# EAGLE board ETD555_PROJECT (EAGLE 9.7.0)
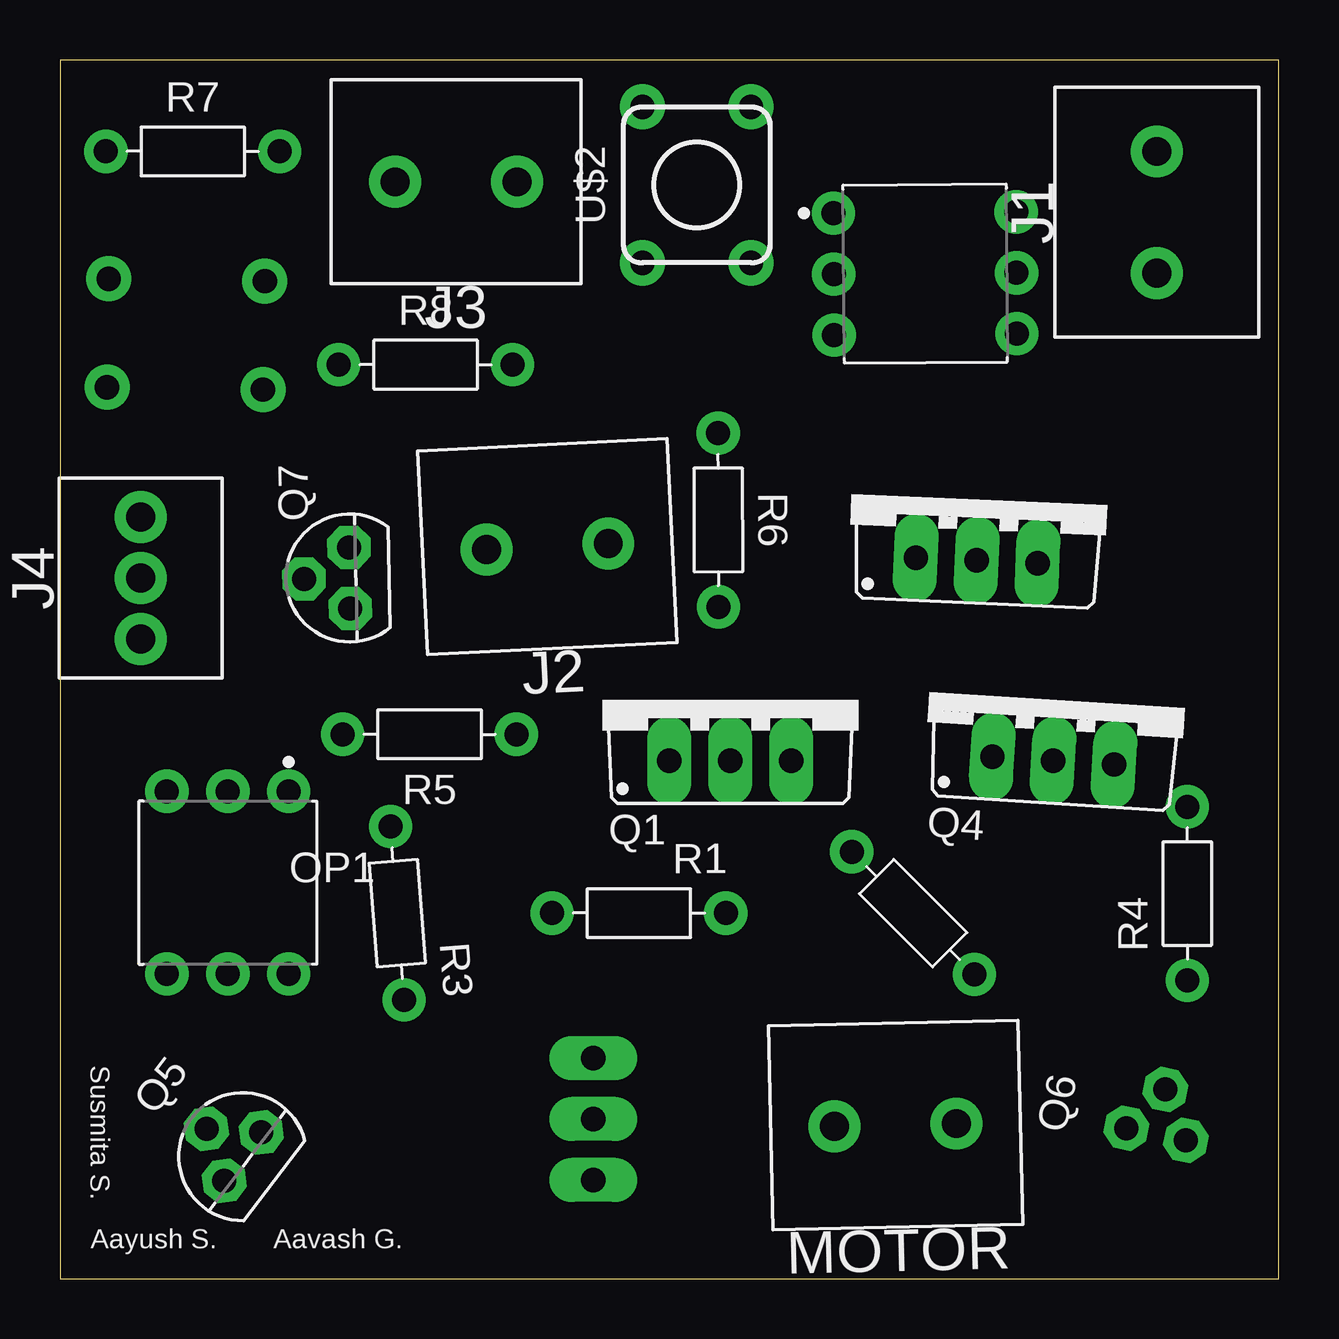
[diagram p0: board, top side]
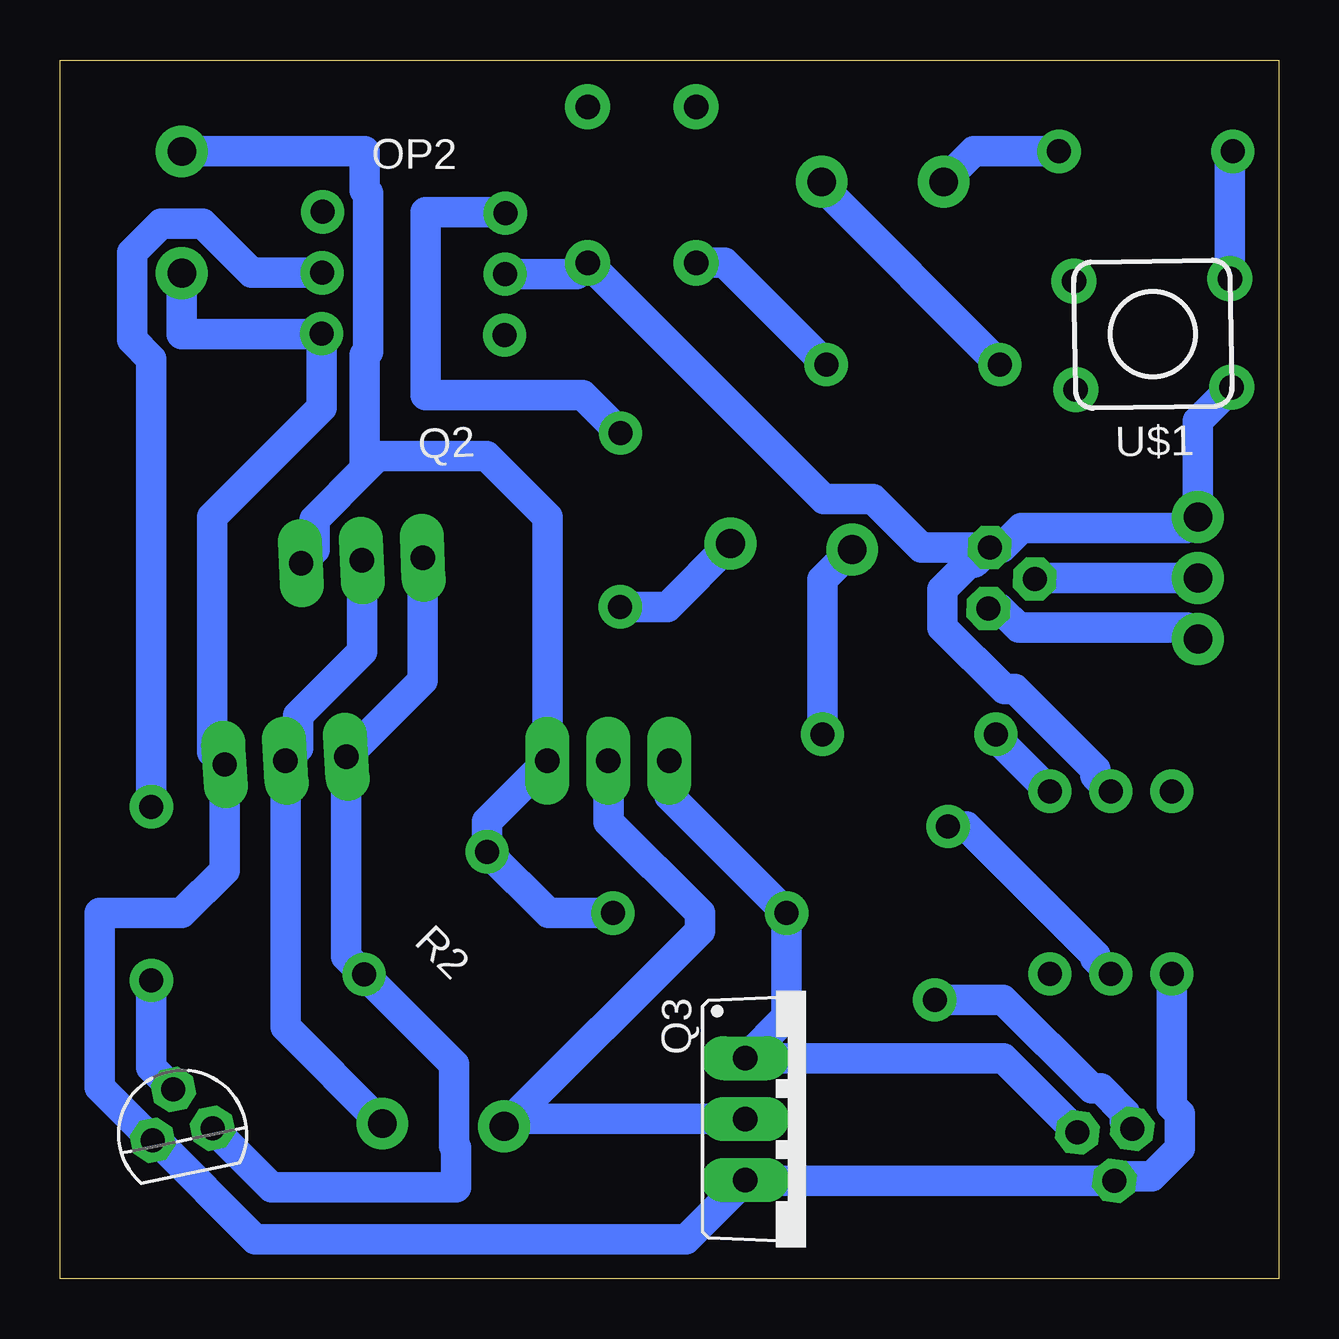
[diagram p1: board, bottom side, seen from below]

Size 50.8 x 50.8 mm. Coordinates in mm from the lower left corner, seen from the top.
Outline: 0,0 50.8,0 50.8,50.8 0,50.8 0,0
Copper layers (1*16): Top 0.035mm / dielectric 1.5mm / Bottom 0.035mm
Design rules "Fusion Electronics Design Rules *": minimum track width 18mil, minimum drill 1mm, track to track 14mil, track to pad 14mil, pad to pad 14mil, via to via 14mil, smd to smd 14mil, copper to edge 40mil, drill to drill 6mil, minimum pad ring 15mil, minimum via ring 8mil, stop-mask expansion 4mil, vias tented up to drill 0mil, thermal gap 20mil

## Footprints (pad centres in the part's own frame; a part is rotated, then mirrored left to right if it is on the bottom)
TERMBLK_508-2N = drill 1.2: 1 0,0; 2 5.08,0
TERMBLK_254-3N = drill 1.2: 1 0,0; 2 2.54,0; 3 5.08,0
DIP762W60P254L712H480Q6B = drill 1 pad 1.778: 1 -3.81,2.54; 2 -3.81,0; 3 -3.81,-2.54; 4 3.81,-2.54; 5 3.81,0; 6 3.81,2.54
TO220BV = drill 1.016 long: D 0,-2.54; G -2.54,-2.54; S 2.54,-2.54
TO92 = drill 1 pad 1.778 octagon: 1 -1.27,0; 2 0,1.905; 3 1.27,0
RESAD724W46L381D178B = drill 1 pad 1.778: 1 -3.62,0; 2 3.62,0
SWITCH-MOMENTARY-PTH-6.5MM = drill 1.016 pad 1.88: 1 -3.251,2.261; 2 3.251,2.261; 3 -3.251,-2.261; 4 3.251,-2.261

## Placement (x,y rotation side)
J1  TERM-BLK-2P  [TERMBLK_508-2N]  45.72,46.99 270 top
J2  TERM-BLK-2P  [TERMBLK_508-2N]  17.78,30.39 2.8 top
J3  TERM-BLK-2P  [TERMBLK_508-2N]  13.97,45.72 0 top
J4  TERM-BLK-3P  [TERMBLK_254-3N]  3.37,31.75 270 top
MOTOR  TERM-BLK-2P  [TERMBLK_508-2N]  32.29,6.35 1.3 top
OP1  4N25  [DIP762W60P254L712H480Q6B]  7,16.51 270 top
OP2  4N25  [DIP762W60P254L712H480Q6B]  36.06,41.9 0.4 top
Q1  PMOSFET  [TO220BV]  27.94,24.13 0 top
Q2  PMOSFET  [TO220BV]  38.32,32.48 357.5 top
Q3  NMOSFET  [TO220BV]  19.7,6.65 270 bottom
Q4  NMOSFET  [TO220BV]  41.56,24.13 356.4 top
Q5  NPN  [TO92]  7.62,5.09 52.6 top
Q6  NPN  [TO92]  45.69,6.02 11.6 bottom
Q7  NPN  [TO92]  12.08,29.21 91.2 top
R1  10K  [RESAD724W46L381D178B]  24.13,15.24 0 top
R2  10K  [RESAD724W46L381D178B]  35.56,15.24 135 top
R3  1K  [RESAD724W46L381D178B]  14.06,15.24 274.4 top
R4  1K  [RESAD724W46L381D178B]  46.99,16.05 90 top
R5  220  [RESAD724W46L381D178B]  15.4,22.7 180 top
R6  220  [RESAD724W46L381D178B]  27.44,31.63 270.1 top
R7  10K  [RESAD724W46L381D178B]  5.54,46.99 0 top
R8  10K  [RESAD724W46L381D178B]  15.24,38.1 0 top
U$1  SWITCH_MOMENTARY  [SWITCH-MOMENTARY-PTH-6.5MM]  5.25,39.37 180.9 bottom
U$2  SWITCH_MOMENTARY  [SWITCH-MOMENTARY-PTH-6.5MM]  26.54,45.59 90 top

## Library data of the parts
J1-J3 MOTOR = Connector; CATEGORY: Fixed Terminal Blocks; DESCRIPTION: Fixed Terminal Blocks 5.08MM PCB MOUNT 2P; MANUFACTURER: TE Connectivity AMP Connectors; MPN: 282837-2; OPERATING_TEMPERATURE: -40°C to +105°C; PART_STATUS: ACTIVE; PITCH: 0.200" (5.08mm); ROHS_COMPLIANCE: RoHS Compliant; SERIES: Buchanan; SUBCATEGORY: Terminal Blocks; TYPE: Through Hole; Screw - Rising Cage Clamp; Side wire entry, Horizontal with Board
J4 = Connector; CATEGORY: Fixed Terminal Blocks; DESCRIPTION: Fixed Terminal Blocks 3P TERMINAL BLOCK; MANUFACTURER: TE Connectivity AMP Connectors; MPN: 282834-3; OPERATING_TEMPERATURE: -40°C ~ 105°C; PART_STATUS: Active; PITCH: 0.100" (2.54mm); ROHS_COMPLIANCE: RoHS Compliant; SERIES: Buchanan; SUBCATEGORY: Terminal Blocks; TYPE: Through Hole; Screw - Rising Cage Clamp; Side wire entry, Horizontal with Board
OP1 OP2 = Opto-Electronic; CATEGORY: Opto-Electronic; DESCRIPTION: Optoisolator Transistor with Base Output 5000Vrms Channel 6-DIP; MANUFACTURER: Vishay; MPN: 4N25; OPERATING_TEMP: - 55°C to + 100 °C; PART_STATUS: Active; ROHS_COMPLIANT: COMPLIANT; SERIES: 4N2x; SUB-CATEGORY: Optocoupler; THERMALLOSS: 0.150 W
Q1 Q2 = Tinkercad; CATEGORY: Transistor; SUB-CATEGORY: MOSFET; TYPE: P-Channel
Q3 Q4 = Transistor; CATEGORY: Transistor; SUB-CATEGORY: MOSFET; TYPE: N-Channel
Q5-Q7 = Transistor; CATEGORY: Transistor; SUB-CATEGORY: BJT; TYPE: NPN
R1-R8 = Resistor; CATEGORY: Resistor; SUB-CATEGORY: Fixed
U$1 U$2 = Tinkercad

## Nets
N$1: MOTOR.2 Q2.D Q4.D
N$2: MOTOR.1 Q1.D Q3.D
N$3: J1.1 Q1.S Q2.S R1.2 R2.2
N$4: OP2.1 R6.1
N$5: Q1.G Q3.G Q5.3 R1.1
N$6: J1.2 OP1.4 OP2.4 Q3.S Q4.S Q5.1 Q6.1
N$7: Q6.2 R4.1
N$8: Q5.2 R3.2
N$9: Q2.G Q4.G Q6.3 R2.1
N$10: J2.1 R5.1
N$11: OP1.5 R3.1
N$12: OP1.1 R5.2
N$13: J2.2 R6.2
N$15: J4.2 Q7.2
N$16: J4.1 OP1.2 OP2.2 Q7.3 U$1.1 U$2.3
N$17: J4.3 Q7.1
N$18: R7.1 U$1.3
N$19: R8.2 U$2.1
N$20: OP2.5 R4.2
N$21: J3.1 R7.2
N$22: J3.2 R8.1

## Tracks (layer width: path | path; a pad name or v marks a point on that pad's centre or on a via)
N$1
  Bottom 1.27: Q2.D 38.21,26.14 40.87,23.48 40.87,22.12 Q4.D 41.4,10.5 MOTOR.2
N$2
  Bottom 1.27: Q1.D 27.94,19.05 24.13,15.24 24.13,14.51 MOTOR.1 31.98,6.66 Q3.D
N$3
  Bottom 1.27: R1.2 30.44,15.24 R2.2 33,19.07 Q1.S 30.48,31.75 33.02,34.29 37.55,34.29 38.1,33.74 | J1.1 38.1,46.99 38.1,45.38 37.96,45.24 37.96,38.64 38.1,38.5 38.1,33.74 | 38.1,33.74 40.19,31.65 40.19,30.39 Q2.S
N$4
  Bottom 1.27: R6.1 29.02,36.83 35.56,36.83 35.56,44.45 32.27,44.45 OP2.1
N$5
  Bottom 1.27: Q5.3 11.49,9.2 Q3.G 20.51,10.92 R1.1 25.4,20.13 Q1.G
N$6
  Bottom 1.27: OP1.4 4.46,7.2 4.13,6.88 4.13,5.43 5.29,4.27 6.66,4.27 Q5.1 22.2,4.08 Q3.S 24.7,1.65 42.66,1.65 46.77,5.76 Q6.1 49.15,7.98 49.15,15.24 45.72,15.24 43.94,17.02 Q4.S 44.45,21.95 44.45,31.75 39.89,36.31 OP2.4 39.91,39.37 45.72,39.37 J1.2
N$7
  Bottom 1.27: R4.1 46.99,8.81 Q6.2
N$8
  Bottom 1.27: R3.2 11.49,11.63 7.79,7.93 7.42,7.93 6.41,6.92 6.41,6.55 Q5.2
N$9
  Bottom 1.27: Q2.G 35.67,24.94 Q4.G 38.87,13.43 R2.1 34.38,8.94 34.38,5.54 34.29,5.45 34.29,3.81 41.98,3.81 Q6.3
N$10
  Bottom 1.27: J2.1 19.02,29.14 R5.1
N$11
  Bottom 1.27: OP1.5 7.64,13.35 7.64,13.48 13.01,18.85 R3.1
N$12
  Bottom 1.27: R5.2 11.79,22.57 OP1.1
N$13
  Bottom 1.27: J2.2 25.48,28.01 R6.2
N$15
  Bottom 1.27: J4.2 10.13,29.21 Q7.2
N$16
  Bottom 1.27: OP2.2 29.27,41.88 U$2.3 18.96,32.5 16.91,32.5 14.89,30.48 Q7.3 | Q7.3 11.54,30.48 10.74,31.28 3.83,31.28 J4.1 3.37,35.76 U$1.1 | OP1.2 7.64,20.97 7.64,21.23 11,24.59 11.44,24.59 14.01,27.15 14.01,28.73 12.89,29.85 12.68,29.85 Q7.3
N$17
  Bottom 1.27: J4.3 3.83,27.14 10.84,27.14 11.64,27.94 Q7.1
N$18
  Bottom 1.27: U$1.3 2.03,46.87 R7.1
N$19
  Bottom 1.27: R8.2 23.1,42.34 U$2.1
N$20
  Bottom 1.27: OP2.5 42.81,41.93 44.86,43.98 46.58,43.98 47.79,42.77 47.79,39.14 46.99,38.34 R4.2
N$21
  Bottom 1.27: R7.2 12.7,46.99 J3.1
N$22
  Bottom 1.27: J3.2 19.05,45.53 R8.1

## Text on the board
tPlace: Susmita S. | Aayush S. | Aavash G.